# Altium PCB PCB1.PcbDoc
Units mm, origin at the board's own origin, x right, y up, seen from the top; angles counter-clockwise.
Board outline 56.5 x 65 mm, 2 copper layers (Top Layer, Bottom Layer); 26 components, 38 nets, 106 pads, 5 vias.
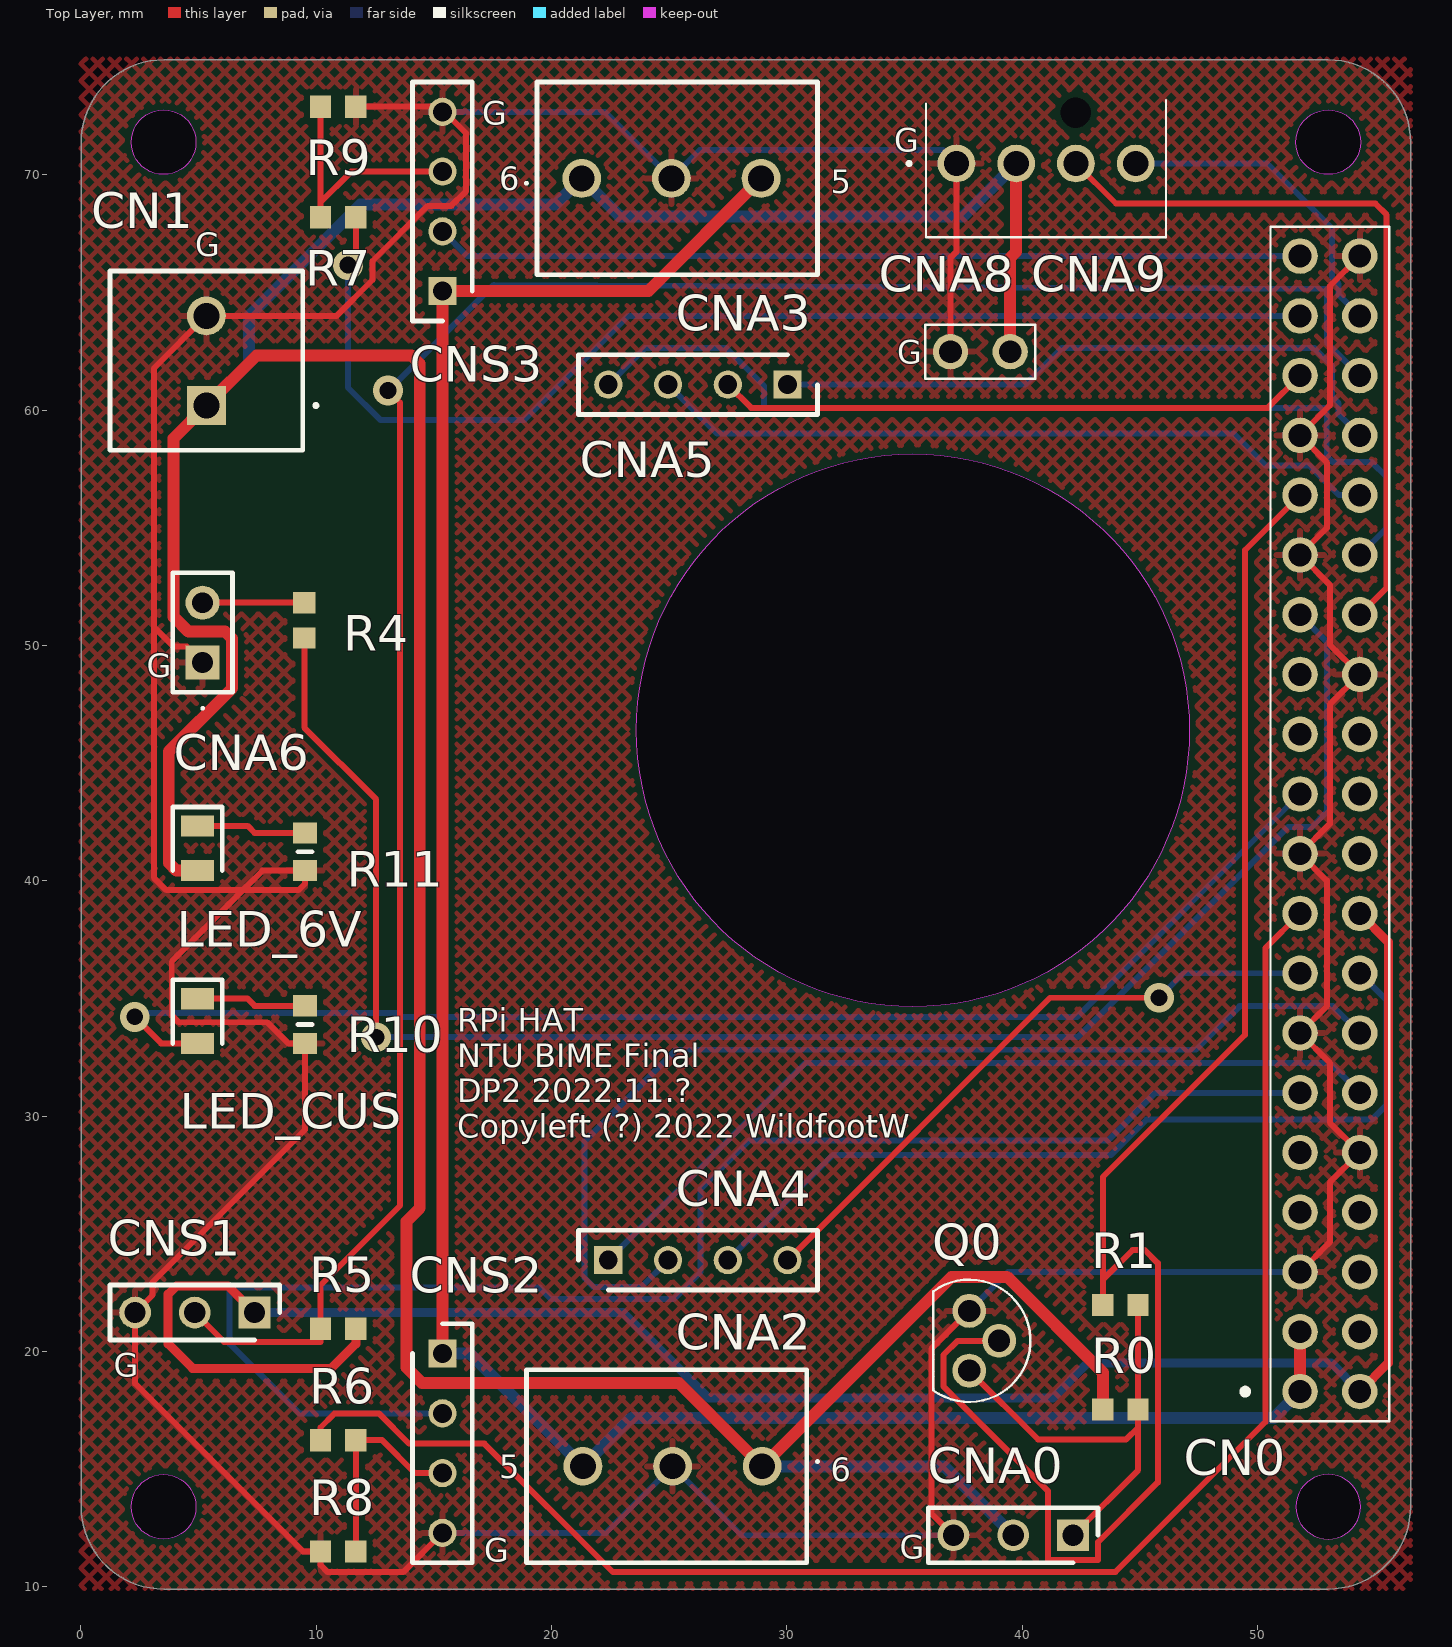
[diagram p0: Top Layer view]
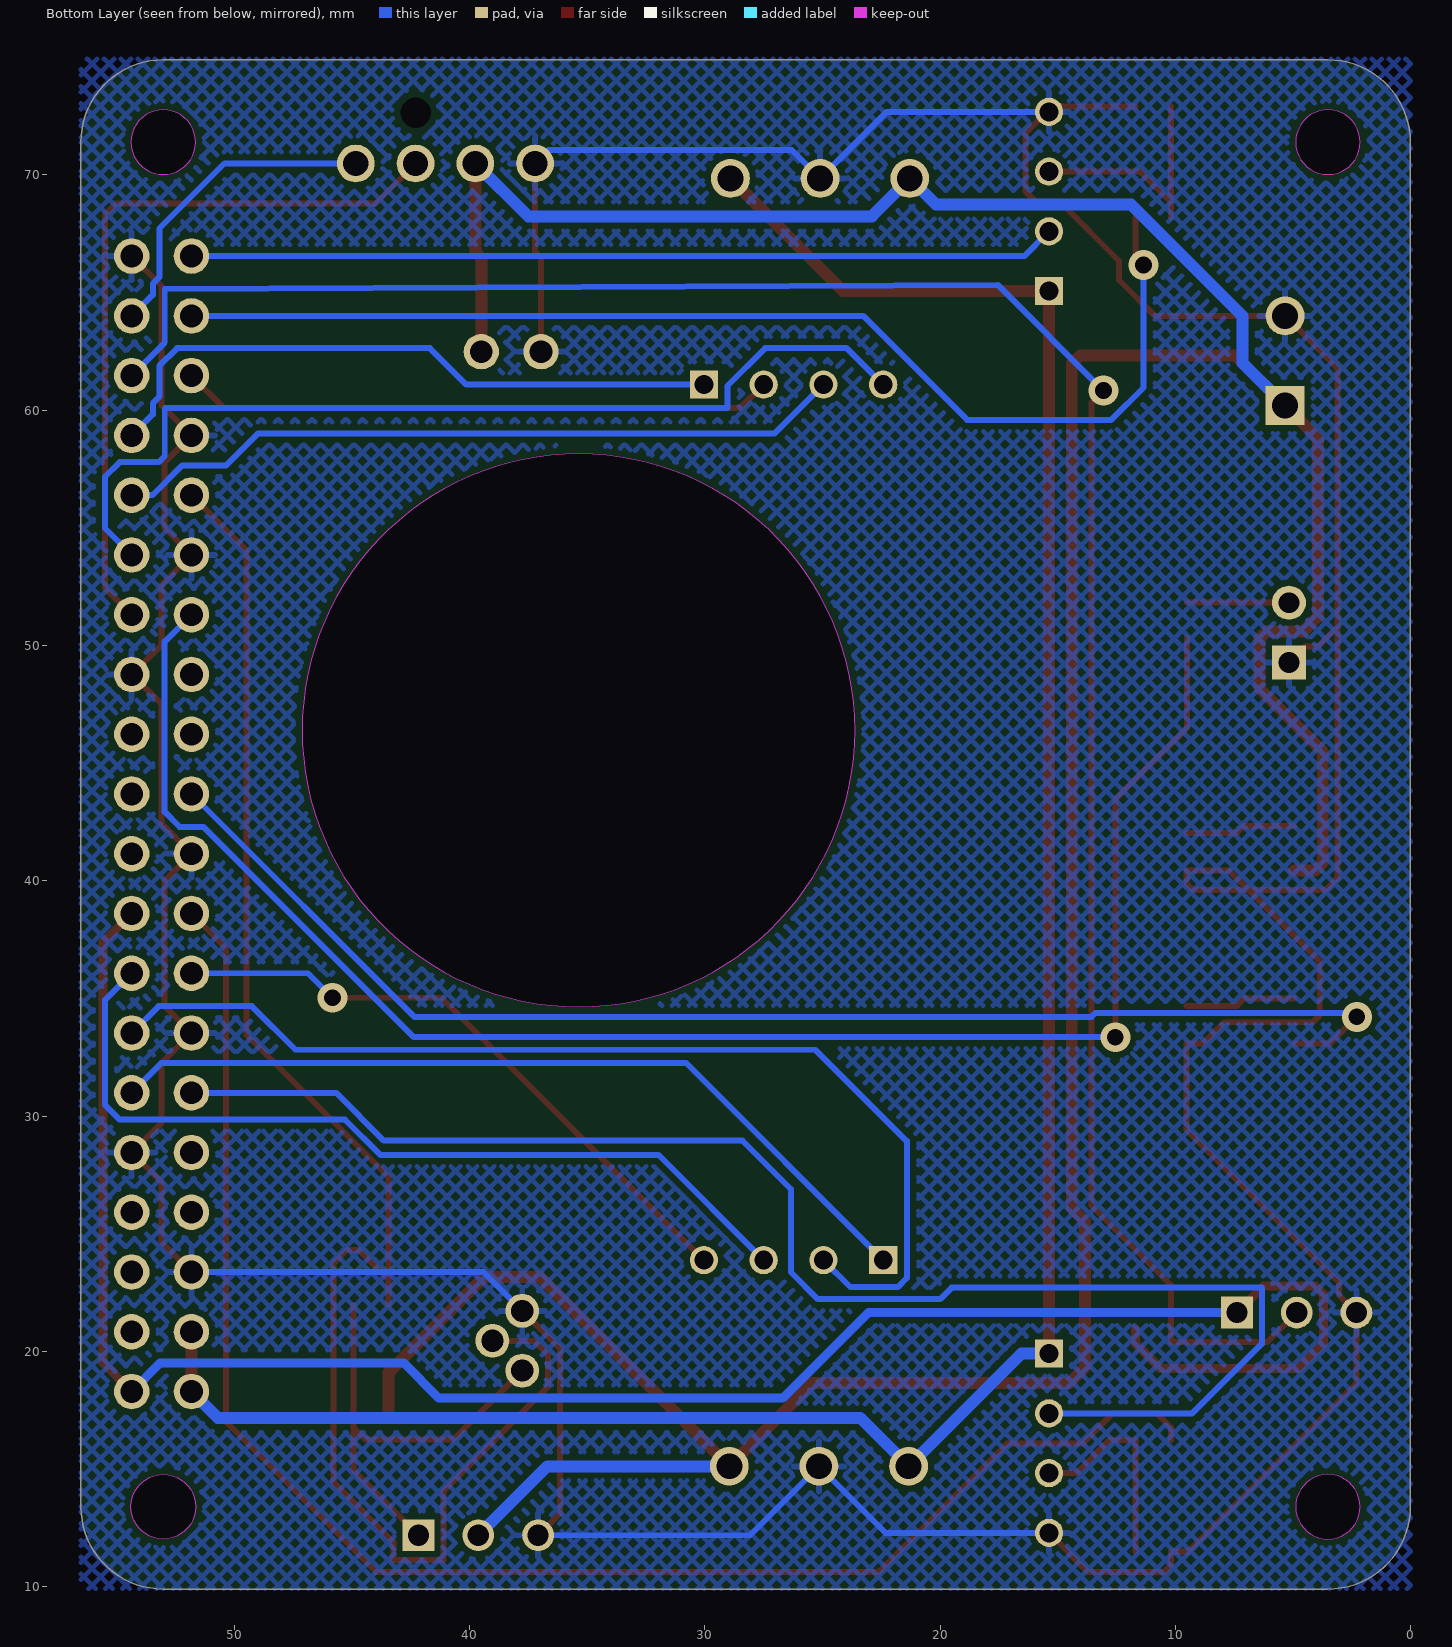
[diagram p1: Bottom Layer view, seen from below]
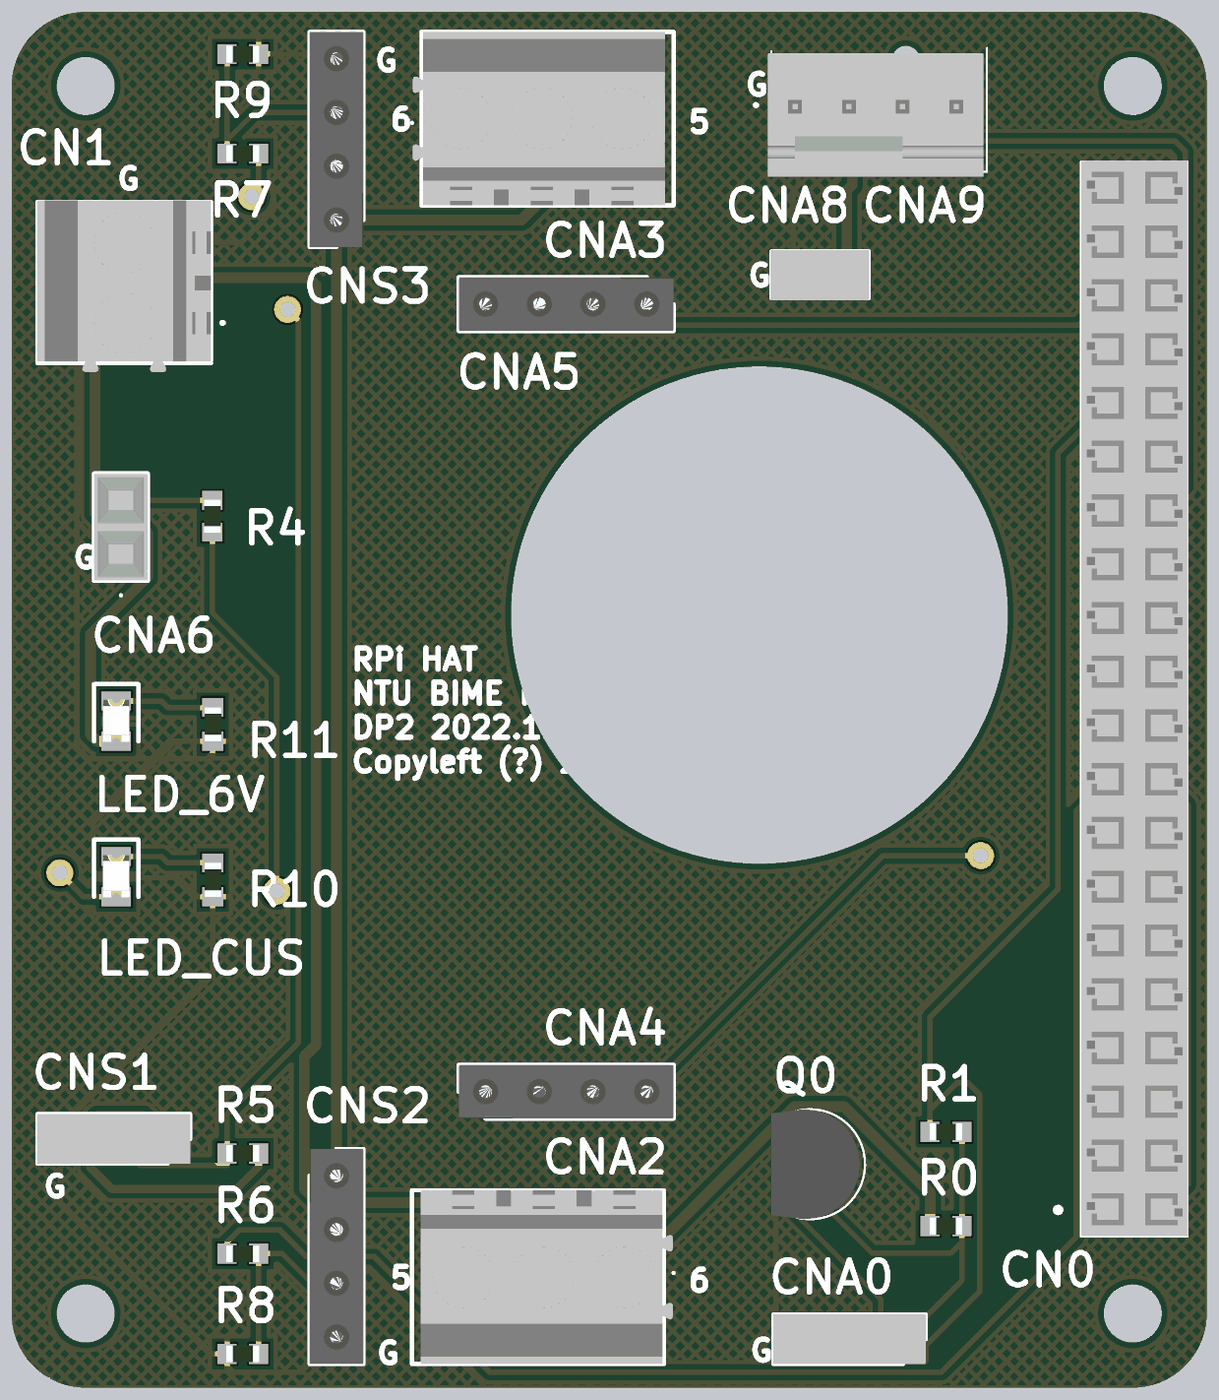
[diagram p2: 3D render of the assembled board from above, using the file's embedded part models]

## Layer stack, top to bottom
Top Solder: solder mask 0.0102, Solder Resist, Dk 3.5
Top Layer: signal copper 0.0356
Dielectric 1: dielectric 0.32, FR-4, Dk 4.8
Bottom Layer: signal copper 0.0356
Bottom Solder: solder mask 0.0102, Solder Resist, Dk 3.5

## Board outline
3.513,9.893 cw(c3.513,13.393) 0.013,13.393 0.013,71.393 cw(c3.513,71.393) 3.513,74.893 53.013,74.893 cw(c53.013,71.393) 56.513,71.393 56.513,13.393 cw(c53.013,13.393) 53.013,9.893
cut-out: 3.513,70.018 cw(c3.513,71.393) 2.138,71.393 cw(c3.513,71.393) 3.513,72.768 cw(c3.513,71.393) 4.888,71.393 cw(c3.513,71.393)
cut-out: 53.013,70.018 cw(c53.013,71.393) 51.638,71.393 cw(c53.013,71.393) 53.013,72.768 cw(c53.013,71.393) 54.388,71.393 cw(c53.013,71.393)
cut-out: 51.638,13.393 ccw(c53.013,13.393) 53.013,12.018 ccw(c53.013,13.393) 54.388,13.393 ccw(c53.013,13.393) 53.013,14.768 ccw(c53.013,13.393)
cut-out: 3.513,12.018 cw(c3.513,13.393) 2.138,13.393 cw(c3.513,13.393) 3.513,14.768 cw(c3.513,13.393) 4.888,13.393 cw(c3.513,13.393)
cut-out: 35.363,34.643 cw(c35.363,46.393) 23.613,46.393 cw(c35.363,46.393) 35.363,58.143 cw(c35.363,46.393) 47.113,46.393 cw(c35.363,46.393)
cut-out: 35.363,34.643 cw(c35.363,46.393) 23.613,46.393 cw(c35.363,46.393) 35.363,58.143 cw(c35.363,46.393) 47.113,46.393 cw(c35.363,46.393)

## Design rules (kind name [scope] priority, off if disabled: settings)
Clearance [All] p1: gap=0.254 ignorepadtopadclearanceinfootprint=FALSE except(0: Arc-Hole Track-Hole SMDPad-Hole THPad-Hole Via-Hole Fill-Hole Poly-Hole Region-Hole Text-Hole)
PolygonConnect [All] p1: connectstyle=Relief reliefconductorwidth=0.254 reliefentries=4 polygonreliefangle="90 Angle" airgapwidth=0.254
RoutingVias [All] p1: holewidth=0.711 width=1.27 viastyle="Through Hole" minholewidth=0.711 minwidth=1.27 maxholewidth=0.711 maxwidth=1.27
SolderMaskExpansion [All] p1: expansion=0.102 istentingtop=FALSE
Width Width_3V3 [InNet('+3V3')] p1: maxlimit=0.508 minlimit=0.381 preferedwidth=0.381 minimp=50.000000 maximp=50.000000 favimp=50.000000
Width Width_5V [InNet('+5')] p2: maxlimit=0.508 minlimit=0.381 preferedwidth=0.508 minimp=50.000000 maximp=50.000000 favimp=50.000000
Width Width_6V [InNet('+6')] p3: maxlimit=0.508 minlimit=0.508 preferedwidth=0.508 minimp=50.000000 maximp=50.000000 favimp=50.000000
Width [All] p4: maxlimit=0.254 minlimit=0.254 preferedwidth=0.254
30 further rules are at their usual default settings.

## Components (designator, comment, footprint, x,y, rotation, side; value= is the part's Value field where it differs from the comment)
CN0 "15-44-5840" 15445840 51.816,18.288 r90 top locked
CN1 "284392-2" 2843922 5.334,60.198 r90 top
CNA0 "4-103321-5" HDRV3W69P0X254_1X3_721X234X1036P 42.164,12.182 r180 top
CNA2 "284392-3" 2843923 28.956,15.113 r180 top
CNA3 "284392-3" 2843923 21.286,69.85 r0 top
CNA4 "801-87-004-10-001101" RHDR4W60P0X254_1X4_1016X254X700P 22.416,23.876 r0 top
CNA5 "801-87-004-10-001101" RHDR4W60P0X254_1X4_1016X254X700P 30.036,61.087 r180 top
CNA6 "5-534206-1" 55342061 5.173,49.276 r0 top
CNA8 "87224-2" 872242 39.497,62.484 r180 top
CNA9 "47053-3000" 470533000 37.211,70.485 r180 top
CNS1 "4-103321-5" HDRV3W69P0X254_1X3_721X234X1036P 7.381,21.647 r180 top
CNS2 "801-87-004-10-001101" RHDR4W60P0X254_1X4_1016X254X700P 15.367,19.903 r270 top
CNS3 "801-87-004-10-001101" RHDR4W60P0X254_1X4_1016X254X700P 15.367,65.06 r90 top
LED_6V "150080BS75000" LEDC2012X80N 4.953,41.382 r270 top
LED_CUS "150080BS75000" LEDC2012X80N 4.953,34.036 r270 top
Q0 "2N7000" TO-92_(TO-226) 37.757,21.717 r90 top
R0 "CPF0603B10KE" RESC1608X55N#1 44.184,17.526 r180 top
R1 "AC0603JR-070RL" RESC1608X55N#1 44.184,21.971 r0 top
R4 "CR0603-FX-3301ELF" RESC1608X55N#1 9.5,51.066 r90 top
R5 "CPF0603B10KE" RESC1608X55N#1 10.934,20.955 r180 top
R6 "CPF0603B470E" RESC1608X55N#1 10.934,16.222 r0 top
R7 "CPF0603B470E" RESC1608X55N#1 10.934,68.199 r180 top
R8 "CPF0603B1KE" RESC1608X55N#1 10.934,11.49 r0 top
R9 "CPF0603B1KE" RESC1608X55N#1 10.934,72.898 r180 top
R10 "CRG0603F330R" RESC1608X55N#2 9.525,33.886 r270 top
R11 "CRG0603F330R" RESC1608X55N#2 9.525,41.232 r270 top

## Footprints (in the part's own frame and the unit in brackets; to place one, negate y for a bottom-side part, rotate by r counter-clockwise, add the part's x,y. Pads: shape width x height; smd on the part's side, far side on the other; paste and mask are expansions set on the pad)
872242 [mil]
  round 59.09 hole 38: 1(0,0) 2(100,0)
  silkscreen extent -42,-45 142,45, body extent -42,-46 142,46, height 410
2843922 [mm]
  rect 1.65x1.65 hole 1.1: 1(0,0)
  round 1.65 hole 1.1: 2(3.81,0)
  silkscreen extent -1.9,-4.7 5.72,4.1, body extent -2.32,-4.1 5.8,4.1, height 13.01
2843923 [mm]
  round 1.65 hole 1.1: 1(0,0) 2(3.81,0) 3(7.62,0)
  silkscreen extent -2.4,-4.1 10.02,4.1, body extent -2.32,-4.1 9.6,4.1, height 13.14
15445840 [mm]
  round 1.509 hole 0.97: A1(0,0) A2(2.54,0) A3(5.08,0) A4(7.62,0) A5(10.16,0) A6(12.7,0) A7(15.24,0) A8(17.78,0) A9(20.32,0) A10(22.86,0) A11(25.4,0) A12(27.94,0) A13(30.48,0) A14(33.02,0) A15(35.56,0) A16(38.1,0) A17(40.64,0) A18(43.18,0) A19(45.72,0) A20(48.26,0) B1(0,-2.54) B2(2.54,-2.54) B3(5.08,-2.54) B4(7.62,-2.54) B5(10.16,-2.54) B6(12.7,-2.54) B7(15.24,-2.54) B8(17.78,-2.54) B9(20.32,-2.54) B10(22.86,-2.54) B11(25.4,-2.54) B12(27.94,-2.54) B13(30.48,-2.54) B14(33.02,-2.54) B15(35.56,-2.54) B16(38.1,-2.54) B17(40.64,-2.54) B18(43.18,-2.54) B19(45.72,-2.54) B20(48.26,-2.54)
  silkscreen extent -1.26,-3.8 49.52,2.43, body extent -1.23,-3.82 49.55,1.24, height 8.58
55342061 [mm]
  rect 1.446x1.446 hole 0.89: 1(0,0)
  round 1.446 hole 0.89: 2(0,2.54)
  silkscreen extent -1.27,-2 1.27,3.81, body extent -1.27,-1.24 1.27,3.78, height 8.58
470533000 [mm]
  round 1.605 hole 1.07: 1(0,0) 2(-2.54,0) 3(-5.08,0) 4(-7.62,0)
  round 0.65 hole 1.3 unplated: MH1(-5.08,-2.16)
  silkscreen extent -8.91,-2.7 2.06,3.14, body extent -8.75,-2.47 1.45,3.37, height 9.72
HDRV3W69P0X254_1X3_721X234X1036P [mm]
  rect 1.35x1.35 hole 0.9: 1(0,0)
  round 1.35 hole 0.9: 2(2.54,0) 3(5.08,0)
  silkscreen extent -1.07,-1.17 6.15,1.17, body extent -1.07,-1.17 6.15,1.17, height 10.37
LEDC2012X80N [mm]
  rect 0.9x1.4 smd: 1(-0.95,0) 2(0.95,0)
  silkscreen extent -1.75,-1.05 0.95,1.05, body extent -1.03,-0.63 0.97,0.63, height 0.7
RESC1608X55N#1 [mm]
  rect 0.9x0.95 smd: 1(-0.75,0) 2(0.75,0)
  body extent -0.77,-0.4 0.77,0.4, height 0.55
RESC1608X55N#2 [mm]
  rect 0.9x1 smd: 1(-0.8,0) 2(0.8,0)
  silkscreen extent 0,-0.3 0,0.3, body extent -0.8,-0.4 0.8,0.4, height 0.55
RHDR4W60P0X254_1X4_1016X254X700P [mm]
  rect 1.2x1.2 hole 0.8: 1(0,0)
  round 1.2 hole 0.8: 2(2.54,0) 3(5.08,0) 4(7.62,0)
  silkscreen extent -1.27,-1.27 8.89,1.27, body extent -1.27,-1.27 8.89,1.27, height 7
TO-92_(TO-226) [mm]
  round 1.44 hole 0.94: 1(0,0) 2(-1.27,-1.27) 3(-2.54,0)
  silkscreen extent -3.87,-2.6 1.33,1.53, body extent -3.87,-2.35 1.33,1.84, height 6.43

## Part data
CN0: "Connector", Manufacturer_Name=Molex, Mouser Part Number=538-15-44-5840, Datasheet Link=https://www.mouser.com/datasheet/2/276/0015445840_PCB_RECEPTACLES-226955.pdf, Height=8.77mm, Manufacturer_Part_Number=15-44-5840, Mouser Price/Stock=https://www.mouser.co.uk/ProductDetail/Molex/15-44-5840?qs=uJX40y%252BSWqi3g3Sr8cjqpQ%3D%3D
CN1: "Connector", Manufacturer_Name="TE Connectivity", Mouser Part Number=571-284392-2, Arrow Part Number=284392-2, Arrow Price/Stock=https://www.arrow.com/en/products/284392-2/te-connectivity?region=nac, Datasheet Link=https://www.te.com/commerce/DocumentDelivery/DDEController?Action=showdoc&DocId=Customer+Drawing%7F284392%7FC%7Fpdf%7FEnglish%7FENG_CD_284392_C.pdf%7F284392-2, Height=12.8mm, Manufacturer_Part_Number=284392-2, Mouser Price/Stock=https://www.mouser.co.uk/ProductDetail/TE-Connectivity/284392-2?qs=79dOc3%2F91%2FeqoQScc1vzQg%3D%3D
CNA0 CNS1: "Connector", Manufacturer_Name="TE Connectivity", Mouser Part Number=571-4-103321-5, Arrow Part Number=4-103321-5, Arrow Price/Stock=https://www.arrow.com/en/products/4-103321-5/te-connectivity?region=nac, Datasheet Link=https://www.arrow.com/en/products/4-103321-5/te-connectivity, Height=10.363mm, Manufacturer_Part_Number=4-103321-5, Mouser Price/Stock=https://www.mouser.co.uk/ProductDetail/TE-Connectivity/4-103321-5?qs=5TwgZeq9E7HSYLqaljJYrw%3D%3D
CNA2 CNA3: "Connector", Manufacturer_Name="TE Connectivity", Mouser Part Number=571-284392-3, Arrow Part Number=284392-3, Arrow Price/Stock=https://www.arrow.com/en/products/284392-3/te-connectivity?region=nac, Datasheet Link=https://www.te.com/commerce/DocumentDelivery/DDEController?Action=srchrtrv&DocNm=1-1773458-1_EURO_STYLE_QRG&DocType=Data+Sheet&DocLang=English&PartCntxt=284392-3&DocFormat=pdf, Height=12.8mm, Manufacturer_Part_Number=284392-3, Mouser Price/Stock=https://www.mouser.co.uk/ProductDetail/TE-Connectivity/284392-3?qs=79dOc3%2F91%2FccaCLojhwxSQ%3D%3D
CNA4 CNA5 CNS2 CNS3: "Connector", Manufacturer_Name=Preci-Dip, Mouser Part Number=437-8018700410001101, Arrow Part Number=801-87-004-10-001101, Arrow Price/Stock=https://www.arrow.com/en/products/801-87-004-10-001101/preci-dip-sa, Datasheet Link=https://componentsearchengine.com/Datasheets/2/801-87-004-10-001101.pdf, Height=7mm, Manufacturer_Part_Number=801-87-004-10-001101, Mouser Price/Stock=https://www.mouser.co.uk/ProductDetail/Preci-dip/801-87-004-10-001101?qs=uQD7XCvsSCN90X3kfh7Tjg%3D%3D
CNA6: "Connector", Manufacturer_Name="TE Connectivity", Mouser Part Number=571-5-534206-1, Arrow Part Number=5-534206-1, Arrow Price/Stock=https://www.arrow.com/en/products/5-534206-1/te-connectivity?region=nac, Datasheet Link=https://componentsearchengine.com/Datasheets/2/5-534206-1.pdf, Height=8.64mm, Manufacturer_Part_Number=5-534206-1, Mouser Price/Stock=https://www.mouser.co.uk/ProductDetail/TE-Connectivity/5-534206-1?qs=UFWaXWs7iImlMkxWCfgYww%3D%3D
CNA8: "Connector", Manufacturer_Name="TE Connectivity", Mouser Part Number=571-872242, Arrow Part Number=87224-2, Arrow Price/Stock=https://www.arrow.com/en/products/87224-2/te-connectivity?region=europe, Datasheet Link=https://datasheet.datasheetarchive.com/originals/distributors/Datasheets_SAMA/3b9b08c08f06dc562fe3ba32b60fa864.pdf, Height=10.3632mm, Manufacturer_Part_Number=87224-2, Mouser Price/Stock=https://www.mouser.co.uk/ProductDetail/TE-Connectivity/87224-2?qs=ZDXmSm13591yVHBRfmL3UQ%3D%3D
CNA9: "Connector", Manufacturer_Name=Molex, Mouser Part Number=538-47053-3000, Datasheet Link=https://www.mouser.com/datasheet/2/276/0470533000_PCB_HEADERS-146177.pdf, Height=9.84mm, Manufacturer_Part_Number=47053-3000, Mouser Price/Stock=https://www.mouser.co.uk/ProductDetail/Molex/47053-3000?qs=C09bn3Oxp5WWv2npicpAUw%3D%3D
LED_6V LED_CUS: "LED", Manufacturer_Name="Wurth Elektronik", Mouser Part Number=710-150080BS75000, Datasheet Link=https://katalog.we-online.com/led/datasheet/150080BS75000.pdf, Height=0.8mm, Manufacturer_Part_Number=150080BS75000, Mouser Price/Stock=https://www.mouser.co.uk/ProductDetail/Wurth-Elektronik/150080BS75000?qs=2kOmHSv6VfT2tBo3UPVqAQ%3D%3D
Q0: "MOSFET (N-Channel)", Manufacturer_Name=onsemi, Mouser Part Number=512-2N7000, Arrow Part Number=2N7000, Arrow Price/Stock=https://www.arrow.com/en/products/2n7000/on-semiconductor?region=nac, Datasheet Link=http://www.onsemi.com/pub/Collateral/NDS7002A-D.PDF, Height=5.33mm, Manufacturer_Part_Number=2N7000, Mouser Price/Stock=https://www.mouser.co.uk/ProductDetail/ON-Semiconductor-Fairchild/2N7000?qs=FOlmdCx%252BAA2o%2FKZOTk%2F3hg%3D%3D
R0 R5: "Resistor", Manufacturer_Name="TE Connectivity", Mouser Part Number=279-CPF0603B10KE, Arrow Part Number=CPF0603B10KE, Arrow Price/Stock=https://www.arrow.com/en/products/cpf0603b10ke/te-connectivity?region=nac, Datasheet Link=http://www.farnell.com/datasheets/1786775.pdf, Height=0.55mm, Manufacturer_Part_Number=CPF0603B10KE, Mouser Price/Stock=https://www.mouser.co.uk/ProductDetail/TE-Connectivity-Holsworthy/CPF0603B10KE?qs=DfH2yQaBz6sBU3bWyKu9NQ%3D%3D
R1: "Resistor", Manufacturer_Name=KEMET, Mouser Part Number=603-AC0603JR-070RL, Arrow Part Number=AC0603JR-070RL, Arrow Price/Stock=https://www.arrow.com/en/products/ac0603jr-070rl/yageo, Datasheet Link=https://componentsearchengine.com/Datasheets/2/AC0603JR-070RL.pdf, Height=0.55mm, Manufacturer_Part_Number=AC0603JR-070RL, Mouser Price/Stock=https://www.mouser.co.uk/ProductDetail/Yageo/AC0603JR-070RL?qs=cGU37fGUGy%252BRlrkivEI2Lg%3D%3D
R4: "Resistor", Manufacturer_Name=Bourns, Mouser Part Number=652-CR0603-FX3301ELF, Arrow Part Number=CR0603-FX-3301ELF, Arrow Price/Stock=https://www.arrow.com/en/products/cr0603-fx-3301elf/bourns, Datasheet Link=https://www.bourns.com/pdfs/chpreztr.pdf, Height=0.55mm, Manufacturer_Part_Number=CR0603-FX-3301ELF, Mouser Price/Stock=https://www.mouser.co.uk/ProductDetail/Bourns/CR0603-FX-3301ELF?qs=I4suiNu8FYAeN75YxKNWXA%3D%3D
R6 R7: library part CPF0603B470KE, "Resistor", Manufacturer_Name="TE Connectivity", Mouser Part Number=279-CPF0603B470KE, Datasheet Link=http://www.farnell.com/datasheets/1786775.pdf, Height=0.55mm, Manufacturer_Part_Number=CPF0603B470KE, Mouser Price/Stock=https://www.mouser.co.uk/ProductDetail/TE-Connectivity-Neohm/CPF0603B470KE?qs=gt1LBUVyoHmzllBO311l3A%3D%3D
R8 R9: library part CPF0603B10RE1, "Resistor", Manufacturer_Name="TE Connectivity", Mouser Part Number=279-CPF0603B10RE1, Arrow Part Number=CPF0603B10RE1, Arrow Price/Stock=https://www.arrow.com/en/products/cpf0603b10re1/te-connectivity, Datasheet Link=http://www.farnell.com/datasheets/1786775.pdf, Height=0.55mm, Manufacturer_Part_Number=CPF0603B10RE1, Mouser Price/Stock=https://www.mouser.co.uk/ProductDetail/TE-Connectivity-Holsworthy/CPF0603B10RE1?qs=8H%2F0gMnrDruueUSujn28yg%3D%3D
R10 R11: "Resistor", Manufacturer_Name="TE Connectivity", Mouser Part Number=279-CRG0603F330R, Arrow Part Number=CRG0603F330R, Arrow Price/Stock=https://www.arrow.com/en/products/crg0603f330r/te-connectivity, Datasheet Link=https://datasheet.datasheetarchive.com/originals/distributors/DKDS-21/401698.pdf, Height=0.55mm, Manufacturer_Part_Number=CRG0603F330R, Mouser Price/Stock=https://www.mouser.co.uk/ProductDetail/TE-Connectivity-Neohm/CRG0603F330R?qs=VHcS2MTj4gbwoBQCSa%252B2DQ%3D%3D

## Via types
v1: diameter 1.27, hole 0.711, Top Layer to Bottom Layer, 5 vias

## Nets (pads, with @x,y where several pads share a name; then routed paths per layer and width w, separated by ;. In a path a pad name is that pad's centre, name@x,y a point inside that pad or via, vN(x,y) a via of type N, cw(c..) or ccw(c..) an arc to the next point about the centre after c; other vN are vias at no path point)
+3V3: CN0.B1 CN0.B9 CNS1.1 R5.1 | length 86.8
  Top Layer w0.381: CNS1.1 6.245,22.784 4.064,22.784 3.708,22.428 3.708,20.32 4.75,19.279 10.643,19.279 11.684,20.32 R5.1 ; CN0.B1 55.575,19.507 55.575,37.389 CN0.B9
  Bottom Layer w0.381: CNS1.1 23.05,21.647 26.689,18.009 41.3,18.009 42.799,19.507 53.137,19.507 CN0.B1
+5: CN0.A1 CN0.A2 CNA2.3 CNA3.3 CNS2.1 CNS3.1 | length 103
  Top Layer w0.508: CNS2.1 CNS3.1 24.116,65.06 CNA3.3 ; CN0.A1 CN0.A2
  Bottom Layer w0.508: CNS2.1 16.546,19.903 CNA2.3 23.393,17.17 50.698,17.17 CN0.A1
+6: CN1.1 CNA0.2 CNA2.1 CNA3.1 CNA8.1 CNA9.2 LED_6V.2 R0.2 | length 176.5
  Top Layer w0.508: LED_6V.2 4.064,40.432 3.734,40.762 3.734,45.491 6.426,48.184 6.426,50.292 6.133,50.585 4.572,50.585 3.942,51.215 3.942,58.806 CN1.1 7.468,62.332 14.046,62.332 14.402,61.976 14.402,26.086 13.843,25.527 13.843,19.304 14.503,18.644 25.425,18.644 CNA2.1 37.008,23.165 39.37,23.165 43.434,19.101 R0.2 ; CNA8.1 39.497,66.472 39.751,66.726 CNA9.2
  Bottom Layer w0.508: CN1.1 7.147,62.011 7.147,64.006 11.873,68.732 20.168,68.732 CNA3.1 22.901,68.235 37.501,68.235 CNA9.2 ; CNA2.1 36.693,15.113 CNA0.2
GND: CN0.A3 CN0.A7 CN0.A10 CN0.A15 CN0.A17 CN0.B5 CN0.B13 CN0.B20 CN1.2 CNA0.3 CNA2.2 CNA3.2 CNA6.1 CNA8.2 CNA9.1 CNS1.3 CNS2.4 CNS3.4 Q0.1 R8.1 R9.1 R10.2 R11.2 | length 238.4
  Top Layer w0.254: CNA6.1 4.499,49.95 3.949,49.95 3.099,50.8 ; R9.1 15.24,72.898 CNS3.4@15.412,72.726 ; CNS2.4 13.701,10.617 10.489,10.617 10.184,10.922 R8.1 9.449,11.49 2.301,18.637 CNS1.3 3.041,22.387 3.041,22.932 9.525,29.417 R10.2 8.814,33.086 7.915,33.985 4.166,33.985 3.861,34.29 3.861,36.576 6.883,39.599 ; CNS3.4 CNS3.4@15.412,72.726 ; CNA8.2 36.957,66.472 37.211,66.726 CNA9.1 ; CNA0.3 36.148,13.118 36.148,20.108 Q0.1 ; CN0.A3 53.086,24.638 53.086,27.178 CN0.B5 53.086,29.718 53.086,32.258 CN0.A7 52.959,34.671 52.959,40.005 CN0.A10 53.086,42.418 53.086,47.498 CN0.B13 53.086,50.038 53.086,52.578 CN0.A15 52.959,54.991 52.959,57.785 CN0.A17 53.086,60.198 53.086,65.278 CN0.B20 ; 3.099,50.8 3.099,61.773 CN1.2 10.867,64.008 12.391,65.532 12.391,66.341 14.732,68.682 15.748,68.682 16.358,69.291 16.358,71.78 CNS3.4@15.412,72.726 ; 3.099,50.8 3.099,40.132 3.632,39.599 6.883,39.599 ; 6.883,39.599 7.717,40.432 R11.2 9.525,39.878 9.246,39.599 6.883,39.599
  Bottom Layer w0.254: CNS2.4 22.316,12.283 CNA2.2 28.077,12.182 CNA0.3 ; CNS3.4 22.266,72.68 CNA3.2 26.302,71.056 36.64,71.056 CNA9.1 ; Q0.1 39.408,23.368 CN0.A3
NetCN0_A4: CN0.A4
NetCN0_A5: CN0.A5
NetCN0_A6: CN0.A6 CNS2.2 | length 64
  Bottom Layer w0.254: CNS2.2 9.282,17.363 6.325,20.32 6.325,22.708 19.507,22.708 19.996,22.219 25.191,22.219 26.34,23.368 26.34,26.899 28.397,28.956 43.637,28.956 45.669,30.988 CN0.A6
NetCN0_A8: CN0.A8 CNA4.4 | length 26.8
  Top Layer w0.254: CNA4.4 41.187,35.027 v1(45.822,35.027)
  Bottom Layer w0.254: v1(45.822,35.027) 46.863,36.068 CN0.A8
NetCN0_A9: CN0.A9 R6.1 | length 68.6
  Top Layer w0.254: R6.1 10.184,16.764 10.768,17.348 12.675,17.348 13.945,16.078 17.145,16.078 22.605,10.618 43.968,10.618 50.343,16.993 50.343,37.135 CN0.A9
NetCN0_A11: CN0.A11 LED_CUS.2 | length 56.7
  Top Layer w0.254: v1(2.286,34.214) 3.414,33.086 LED_CUS.2
  Bottom Layer w0.254: v1(2.286,34.214) 2.453,34.381 13.396,34.381 13.564,34.214 42.342,34.214 CN0.A11
NetCN0_A12: CN0.A12
NetCN0_A13: CN0.A13
NetCN0_A14: CN0.A14 R4.1 | length 71.5
  Top Layer w0.254: R4.1 9.5,46.507 12.548,43.459 v1(12.548,33.35)
  Bottom Layer w0.254: v1(12.548,33.35) 42.367,33.35 51.308,42.291 52.324,42.291 52.959,42.926 52.959,50.165 CN0.A14
NetCN0_A16: CN0.A16 Q0.2 R1.1 | length 70
  Top Layer w0.254: Q0.2 37.262,20.447 36.656,19.841 36.656,18.513 41.097,14.072 41.097,11.126 43.231,11.126 43.231,11.887 45.771,14.427 45.771,23.749 45.212,24.308 44.704,24.308 43.434,23.038 ; R1.1 43.434,23.038 ; CN0.A16 49.479,54.051 49.479,33.452 43.434,27.407 43.434,23.038
NetCN0_A18: CN0.A18 CNA5.2 | length 25.3
  Top Layer w0.254: CNA5.2 28.487,60.096 50.444,60.096 CN0.A18
NetCN0_A19: CN0.A19 R7.1 | length 50.2
  Top Layer w0.254: v1(11.354,66.167) 11.684,66.497 R7.1
  Bottom Layer w0.254: v1(11.354,66.167) 11.354,60.96 12.725,59.588 18.847,59.588 23.266,64.008 CN0.A19
NetCN0_A20: CN0.A20 CNS3.2 | length 36.9
  Bottom Layer w0.254: CNS3.2 16.419,66.548 CN0.A20
NetCN0_B2: CN0.B2
NetCN0_B3: CN0.B3
NetCN0_B4: CN0.B4
NetCN0_B6: CN0.B6 CNA4.1 | length 35.9
  Bottom Layer w0.254: CNA4.1 30.798,32.258 53.086,32.258 CN0.B6
NetCN0_B7: CN0.B7 CNA4.2 | length 45.8
  Bottom Layer w0.254: CNA4.2 23.807,22.727 21.799,22.727 21.412,23.114 21.412,28.931 25.298,32.817 47.393,32.817 49.247,34.671 53.213,34.671 CN0.B7
NetCN0_B8: CN0.B8 CNA4.3 | length 36.8
  Bottom Layer w0.254: CNA4.3 31.966,28.346 43.79,28.346 45.288,29.845 54.864,29.845 55.499,30.48 55.499,34.925 CN0.B8
NetCN0_B10: CN0.B10
NetCN0_B11: CN0.B11
NetCN0_B12: CN0.B12
NetCN0_B14: CN0.B14 CNA9.3 | length 31.6
  Top Layer w0.254: CNA9.3 43.993,68.783 55.016,68.783 55.499,68.301 55.499,52.451 CN0.B14
NetCN0_B15: CN0.B15 CNA5.4 | length 41.5
  Bottom Layer w0.254: CNA5.4 23.965,62.636 27.432,62.636 29.032,61.036 29.032,60.096 52.926,60.096 52.952,60.071 52.952,58.054 53.213,57.792 54.864,57.792 55.499,57.157 55.499,54.991 CN0.B15
NetCN0_B16: CN0.B16 CNA5.3 | length 31.3
  Bottom Layer w0.254: CNA5.3 27.039,59.004 48.997,59.004 50.343,57.658 52.204,57.658 53.474,56.388 CN0.B16
NetCN0_B17: CN0.B17 CNA5.1 | length 27.5
  Bottom Layer w0.254: CNA5.1 40.132,61.087 41.681,62.636 52.426,62.636 53.181,61.881 53.181,60.572 53.46,60.293 53.46,59.824 CN0.B17
NetCN0_B18: CN0.B18 CNS1.2 R5.2 | length 93.9
  Top Layer w0.254: CNS1.2 6.091,20.397 10.184,20.397 R5.2 10.184,22.808 13.564,26.187 13.564,60.325 v1(13.056,60.833)
  Bottom Layer w0.254: v1(13.056,60.833) 17.551,65.329 52.952,65.151 52.952,62.872 CN0.B18
NetCN0_B19: CN0.B19 CNA9.4 | length 13.7
  Bottom Layer w0.254: CNA9.4 50.419,70.485 53.181,67.723 53.181,65.652 53.46,65.373 53.46,64.904 CN0.B19
NetCNA0_1: CNA0.1 Q0.3 R0.1 R1.2 | length 19.5
  Top Layer w0.254: Q0.3 40.678,16.256 44.426,16.256 44.934,16.764 ; CNA0.1 44.934,14.952 44.934,16.764 ; R1.2 R0.1 44.934,16.764
NetCNA6_2: CNA6.2 R4.2 | length 4.3
  Top Layer w0.254: CNA6.2 R4.2
NetCNS2_3: CNS2.3 R6.2 R8.2 | length 9
  Top Layer w0.254: R8.2 R6.2 12.802,16.222 14.201,14.823 CNS2.3
NetCNS3_3: CNS3.3 R7.2 R9.2 | length 10.4
  Top Layer w0.254: R7.2 10.184,68.834 ; R9.2 10.184,68.834 ; CNS3.3 11.49,70.14 10.184,68.834
NetLED_6V_1: LED_6V.1 R11.1 | length 4.7
  Top Layer w0.254: LED_6V.1 7.087,42.332 7.387,42.032 R11.1
NetLED_CUS_1: LED_CUS.1 R10.1 | length 4.7
  Top Layer w0.254: LED_CUS.1 7.087,34.986 7.387,34.686 R10.1
pads on no net: CNA9.MH1

## Polygon pours and split planes (outlines as drawn)
GND on Bottom Layer "GND_L02_P000" (hatched 45Degree grid 0.508 track 0.203, remove dead copper, pour order 0): 0,74.93 0,9.906 56.515,9.906 56.515,74.93
GND on Top Layer "GND_L01_P001" (hatched 45Degree grid 0.508 track 0.203, remove dead copper, pour order 1): 0,74.93 0,9.906 56.515,9.906 56.515,74.93

## Silkscreen, mask and mechanical layers (free items; w line width, h text height)
Top Overlay:
  text "G" at 17.061,72.121 h1
  text "G" at 34.578,70.982 h1
  text "6" at 17.78,69.342 h1
  text "5" at 31.877,69.215 h1
  text "G" at 4.869,66.533 h1
  text "G" at 34.705,61.965 h1
  text "G" at 2.794,48.641 h1
  text "RPi HAT / NTU BIME Final / DP2 2022.11.? / Copyleft (?) 2022 WildfootW" at 16.002,29.083 h1
  text "G" at 1.397,18.923 h1
  text "5" at 17.78,14.605 h1
  text "6" at 31.877,14.478 h1
  text "G" at 34.798,11.176 h1
  text "G" at 17.145,11.049 h1
Mechanical 7:
  circle w0.013: c35.363,46.393 r11.75
  circle w0.013: c53.013,71.393 r1.375
  circle w0.013: c3.513,71.393 r1.375
  circle w0.013: c3.513,13.393 r1.375
  circle w0.013: c53.013,13.393 r1.375
  lines w0.013: 0.013,13.393 ccw(c3.513,13.393) 3.513,9.893 53.013,9.893 ccw(c53.013,13.393) 56.513,13.393 56.513,71.393 ccw(c53.013,71.393) 53.013,74.893 3.513,74.893 ccw(c3.513,71.393) 0.013,71.393 0.013,13.393 ; 49.863,17.143 56.163,17.143 56.163,67.643 49.863,67.643 49.863,17.143